# Altium PCB Power_supply_ver5.0.0.PcbDoc
Units mil, origin at the board's own origin, x right, y up, seen from the top; angles counter-clockwise.
Board outline 3734.72 x 2529.72 mil, 2 copper layers (Top Layer, Bottom Layer); 93 components, 41 nets, 269 pads, 30 vias.
Unrouted connection lines stored in the file: 19.
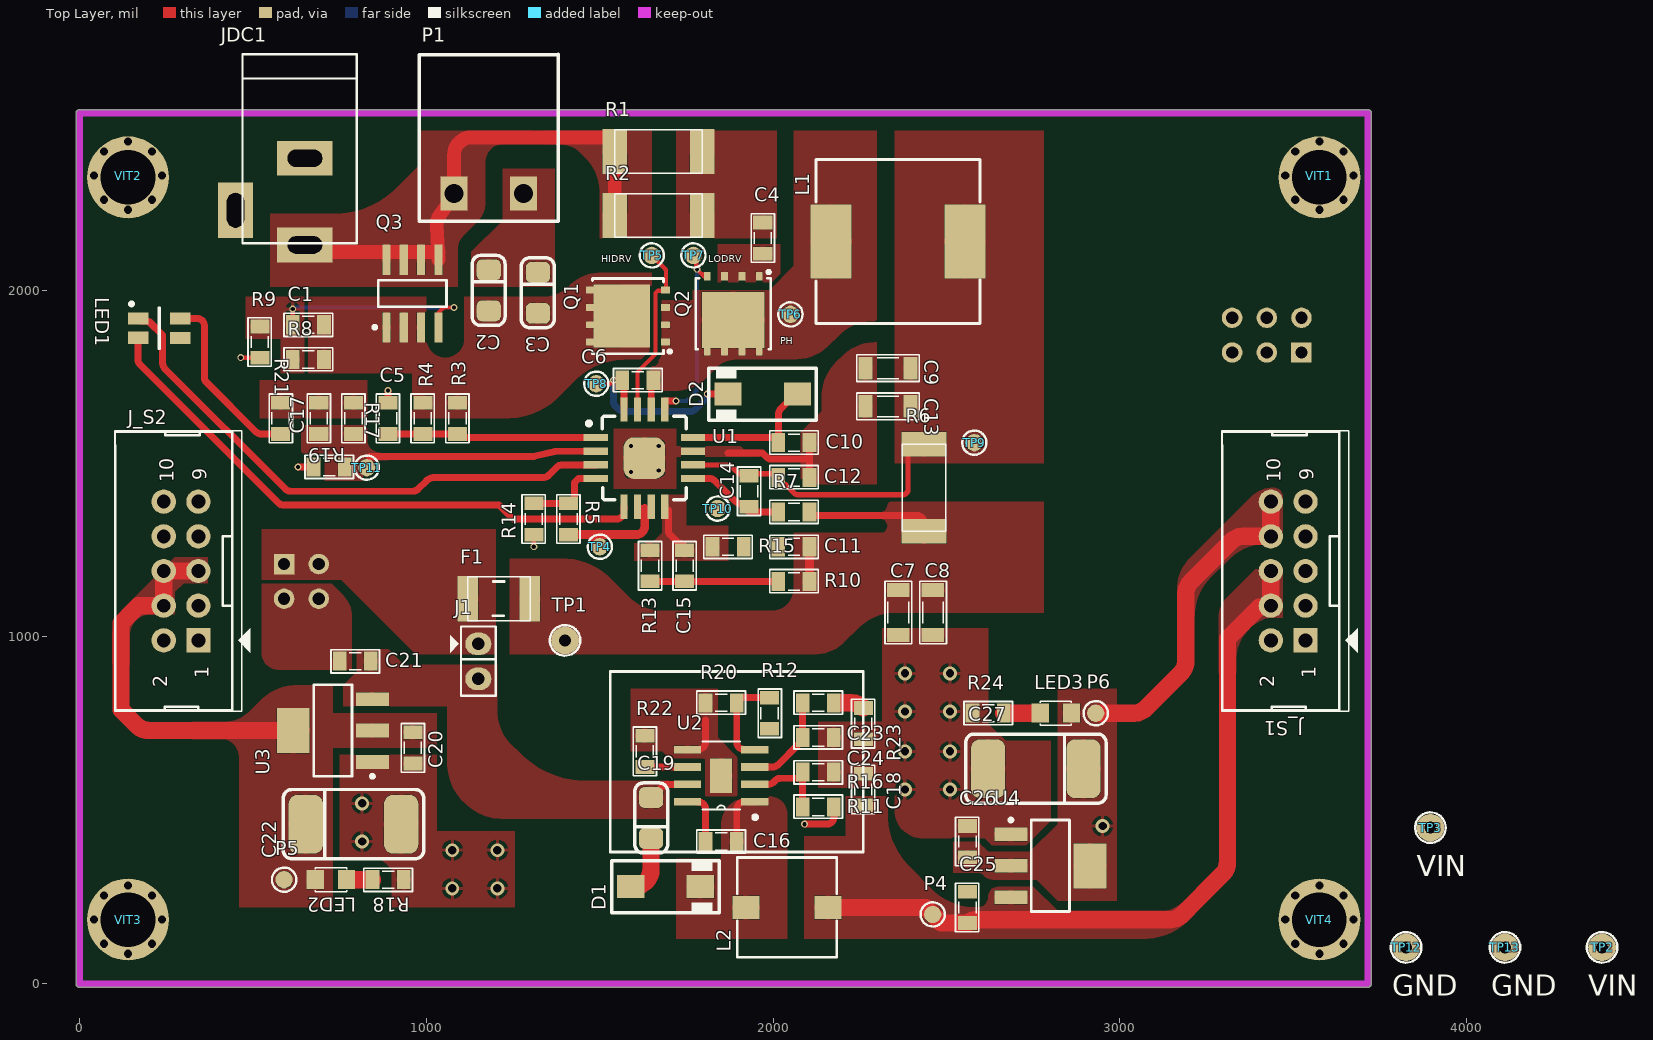
[diagram p0: Top Layer view]
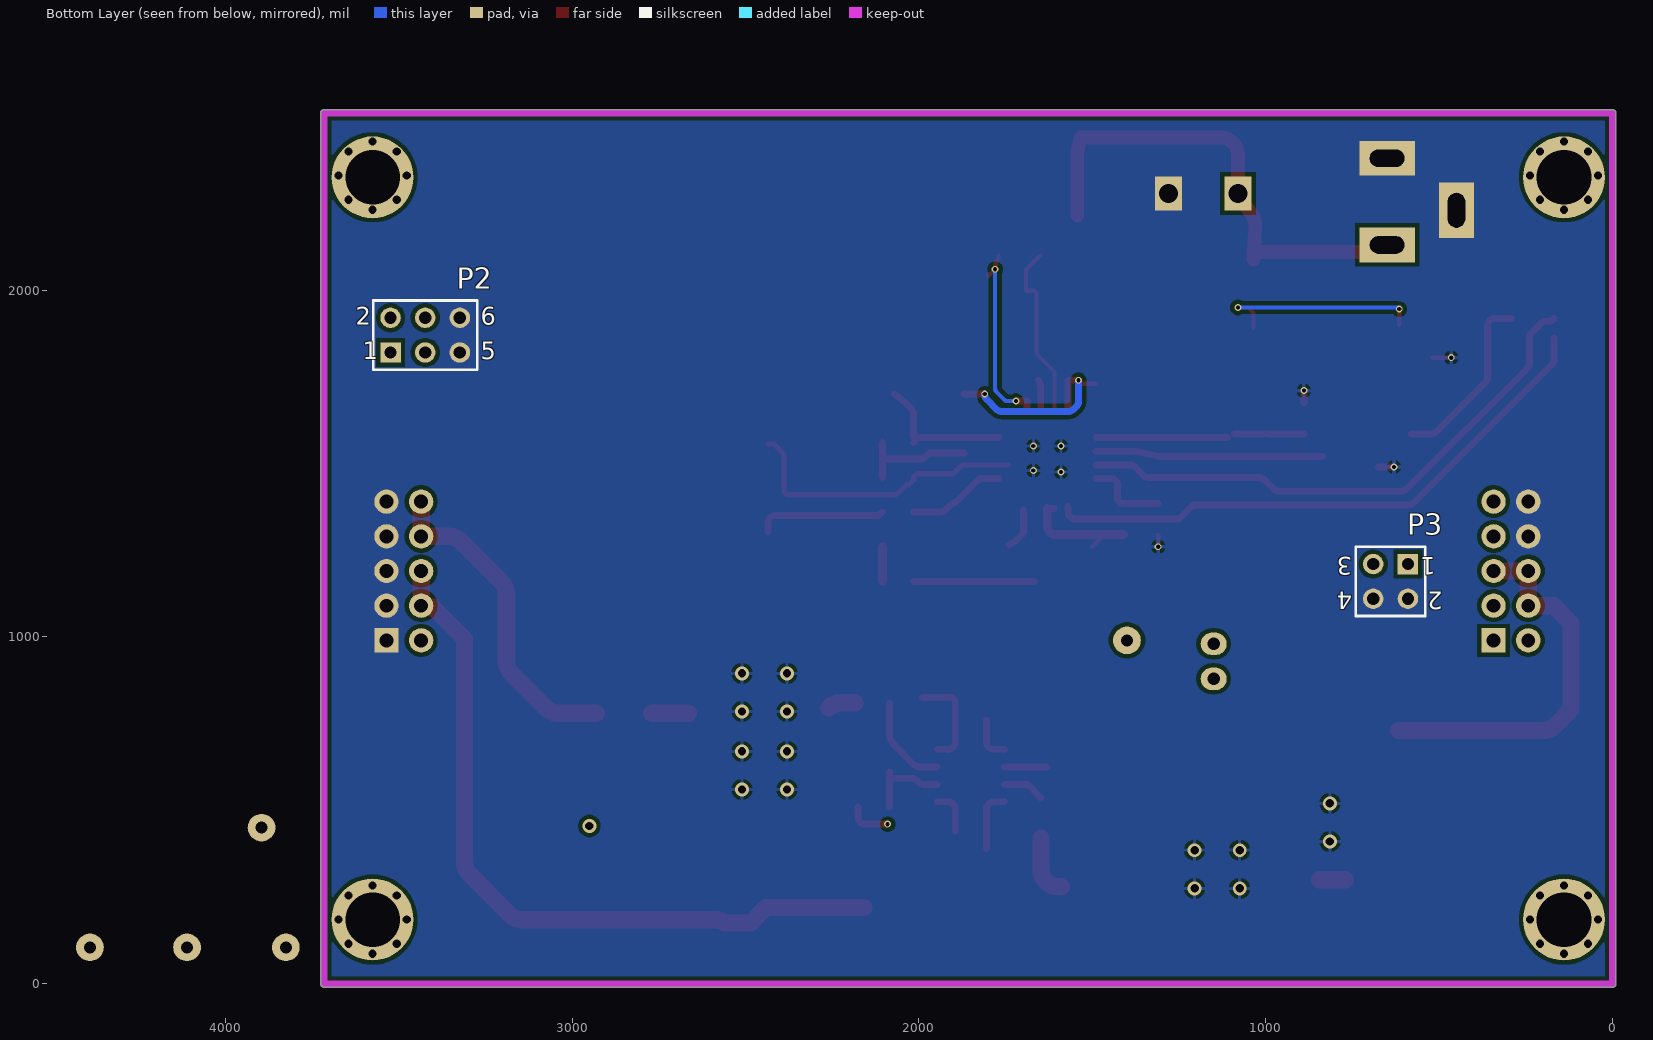
[diagram p1: Bottom Layer view, seen from below]

## Layer stack, top to bottom
Top Solder: solder mask 0.4, Solder Resist, Dk 3.5
Top Layer: signal copper 1.4
Dielectric 1: dielectric 12.6, FR-4, Dk 4.8
Bottom Layer: signal copper 1.4
Bottom Solder: solder mask 0.4, Solder Resist, Dk 3.5

## Board outline
0,-9.86 cw(c0,0) -9.86,0.08 -9.86,0.1 -9.86,2510 cw(c0,2510) 0,2519.86 3715,2519.86 cw(c3715,2510) 3724.86,2510 3724.86,0 cw(c3715,0) 3715,-9.86

## Design rules (kind name [scope] priority, off if disabled: settings)
Clearance [All] p1: gap=12 ignorepadtopadclearanceinfootprint=FALSE except(0: Arc-Text Arc-Hole Track-Text Track-Hole SMDPad-Text SMDPad-Hole THPad-Text THPad-Hole Via-Text Via-Hole Fill-Text Fill-Hole Poly-Text Poly-Hole Region-Text Region-Hole Text-Text Text-Hole; 8: Arc-Arc Arc-Track Arc-THPad Arc-Via Track-Track Track-THPad Track-Via SMDPad-THPad SMDPad-Via THPad-THPad THPad-Via Via-Via; 10: Arc-SMDPad Track-SMDPad SMDPad-SMDPad)
HoleSize HoleSize_1 [All] p1: absolutevalues=TRUE maxlimit=100 minlimit=1 maxpercent=80.000 minpercent=20.000
PlaneClearance [All] p1: clearance=15
PolygonConnect [All] p1: thpad.connectstyle=Direct thpad.reliefconductorwidth=10 thpad.reliefentries=4 thpad.polygonreliefangle="90 Angle" thpad.airgapwidth=10 smdpad.connectstyle=Relief smdpad.reliefconductorwidth=15 smdpad.reliefentries=4 smdpad.polygonreliefangle="90 Angle" smdpad.airgapwidth=0 via.connectstyle=Relief via.reliefconductorwidth=12 via.reliefentries=4 via.polygonreliefangle="90 Angle" via.airgapwidth=10
RoutingPriority [InNet('No Net')] p1: routingpriority=0
RoutingVias [All] p1: holewidth=20 width=20 viastyle="Through Hole" minholewidth=12 minwidth=20 maxholewidth=28 maxwidth=50
SMDToPlane [All] p1: distance=0
SolderMaskExpansion [All] p1: expansion=4 istentingtop=FALSE
SupplyNets "Schematic Supply Nets_6" [InNet('TERM_EN')] p1: voltage=0.000
SupplyNets "Schematic Supply Nets_5" [InNet('3V3')] p2: voltage=0.000
SupplyNets "Schematic Supply Nets_4" [InNet('GND')] p3: voltage=0.000
SupplyNets "Schematic Supply Nets_2" [InNet('5V_PS')] p4: voltage=0.000
SupplyNets "Schematic Supply Nets_1" [InNet('-5V')] p5: voltage=0.000
SupplyNets "Schematic Supply Nets" [InNet('5V_LDO')] p6: voltage=0.000
UnRoutedNet [All] p1: checkbadconnections=TRUE
Width [All] p1: maxlimit=50 minlimit=12 preferedwidth=20
26 further rules are at their usual default settings.

## Classes and differential pairs
component class Power_supply: C1 C2 C3 C4 C5 C6 C7 C8 C9 C10 C11 C12 C13 C14 C15 C16 C17 C18 C19 C21 C23 C24 C25 C27 D1 D2 F1 J1 J_S1 J_S2 JDC1 L1 L2 LED1 LED3 P1 P2 P3 P4 P5 Q1 Q2 Q3 R1 R2 R3 R4 R5 R6 R7 R8 R9 R10 R11 R12 R13 R14 R15 R16 R17 R18 R19 R20 R21 R22 R23 TP1 TP10 TP11 TP12 TP13 U1 U2 U3 VIT1 VIT2 VIT3 VIT4

## Components (designator, comment, footprint, x,y, rotation, side; value= is the part's Value field where it differs from the comment)
C1 "0.1uF" CAP_0805 660,1900 r0 top value=33p
C2 "106" CAP_3216 1178,1996.99 r270 top value=33p
C3 "106" CAP_3216 1320,1990 r270 top value=33p
C4 "2.2uF" CAP_0805 1970,2150 r90 top value=33p
C5 "0.1uF" CAP_0805 890,1630 r270 top value=33p
C6 "1uF" CAP_0805 1610,1740 r180 top value=33p
C7 "4.7uF" CAP_1206 2360.63,1070.32 r270 top value=33p
C8 "1uF" CAP_1206 2460.63,1070.32 r270 top value=33p
C9 "10uF" CAP_1206 2331.17,1774.37 r0 top value=33p
C10 "10uF" CAP_0805 2060,1560 r180 top value=33p
C11 "104" CAP_0805 2060,1260 r0 top value=33p
C12 "10uF" CAP_0805 2060,1460 r180 top value=33p
C13 "10uF" CAP_1206 2331.17,1664.37 r0 top value=33p
C14 "10uF" CAP_0805 1930,1420 r90 top value=33p
C15 "104" CAP_0805 1745,1205 r270 top value=33p
C16 "100nF" CAP_0805 1850,410 r0 top value=33p
C17 "22pF" CAP_0805 690,1630 r90 top value=33p
C18 "22uF 6.3V" CAP_0805 2260,560 r270 top value=33p
C19 "10uF 50V" CAP_3216 1650,480 r90 top value=33p
C20 "100nF" CAP_0805 961.14,680 r90 top value=33p
C21 "100nF" CAP_0805 795,930 r0 top value=33p
C22 "100uF" CAP_7343 787.64,460 r0 top
C23 "220pF" CAP_0805 2130,810 r180 top value=33p
C24 "100nF" CAP_0805 2130,710 r180 top value=33p
C25 "100nF" CAP_0805 2560,220 r270 top value=33p
C26 "100nF" CAP_0805 2560,410 r270 top value=33p
C27 "100uF" CAP_7343 2760,620 r180 top
D1 "SS34-HF" SMA 1690,280 r0 top value="Diode c?m 1N5408"
D2 "1N5819" SMA 1969.84,1700 r180 top value="Diode c?m 1N5408"
F1 "F1A" RES-SMD-1812 1220,1110 r180 top value=Fuse
J1 "Jumper 2" JP2 1150,980 r270 top value="JP 2"
J_S1 "SOURCE" IDC10 3435,1190 r90 top locked value="Header 5x2"
J_S2 "SOURCE_SIG" IDC10 243,1190 r90 top locked value="Header 5x2"
JDC1 "Jac DC" DC-IN 550,2255 r270 top
L1 "10uH" L-SMD-M-12x10 2360,2140 r90 top value="150 mH"
L2 "10uH" L-SMD-M-7.3x4.5 2040,220 r90 top value="150 mH"
LED1 "LED RGB SMD v1" "LED RGB 3528" 230,1890 r0 top
LED2 "LED" LED-0805-Blue 680,300 r0 top value="LED 3 ly Single Colour"
LED3 "LED" LED-0805-Blue 2860,780 r180 top value="LED 3 ly Single Colour"
P1 "BIG_Header 2" "BIG_Header 2" 1080,2278.5 r0 top
P2 "Header 3X2" HDR2X3 3523.32,1820 r180 bottom
P3 "Header 2X2" HDR2X2 590,1210 r0 bottom
P4 "TP" "Testpoint 50ml" 2460,200 r0 top value="Test Point"
P5 "TP" "Testpoint 50ml" 590,300 r90 top value="Test Point"
P6 "TP" "Testpoint 50ml" 2930,780 r0 top value="Test Point"
Q1 "AON6508" MOSFET_HP_8Pin 1581.73,1925 r180 top
Q2 "AON6508" MOSFET_HP_8Pin 1885,1931.73 r270 top
Q3 "AO4407A" SOIC-8 960,1990 r90 top
R1 "2R" RES-SMD-2512 1669.37,2394.68 r0 top
R2 "2R" RES-SMD-2512 1669.37,2209.68 r0 top
R3 "10R" RES-SMD-0805 1090,1630 r270 top
R4 "NC" RES-SMD-0805 990,1630 r270 top
R5 "10k" RES-SMD-0805 1410,1340 r270 top
R6 "0.05" RES-SMD-2512 2440,1430 r90 top
R7 "0R" RES-SMD-0805 2060,1360 r180 top
R8 "10R" RES-SMD-0805 660,1800 r180 top
R9 "10R" RES-SMD-0805 520,1850 r270 top
R10 "0R" RES-SMD-0805 2060,1160 r180 top
R11 "100k" RES-SMD-0805 2130,510 r180 top
R12 "249k" RES-SMD-0805 1990,780 r90 top
R13 "499k" RES-SMD-0805 1645,1205 r90 top
R14 "10k" RES-SMD-0805 1310,1340 r270 top
R15 "100k" RES-SMD-0805 1870,1260 r0 top
R16 "24.9k" RES-SMD-0805 2130,610 r0 top
R17 "499k" RES-SMD-0805 790,1630 r270 top
R18 "220" RES-SMD-0805 890,300 r0 top
R19 "36k" RES-SMD-0805 720,1490 r180 top
R20 "47k" RES-SMD-0805 1850,810 r180 top
R21 "1k" RES-SMD-0805 580,1630 r90 top
R22 "200k" RES-SMD-0805 1630,670 r90 top
R23 "68.1k" RES-SMD-0805 2260,750 r270 top
R24 "220" RES-SMD-0805 2620,780 r180 top
TP1 "TP" TP1 1400,990 r0 top value="Test Point"
TP2 "VIN" TP1 4390,105 r0 top value="Test Point"
TP3 "VIN" TP1 3895,450 r0 top value="Test Point"
TP4 "TP" "Testpoint 50ml" 1500,1260 r0 top value="Test Point"
TP5 "HIDRV" "Testpoint 50ml" 1650,2100 r90 top value="Test Point"
TP6 "PH" "Testpoint 50ml" 2050,1930 r90 top value="Test Point"
TP7 "LODRV" "Testpoint 50ml" 1770,2100 r90 top value="Test Point"
TP8 "TP" "Testpoint 50ml" 1490,1730 r90 top value="Test Point"
TP9 "TP" "Testpoint 50ml" 2580,1560 r90 top value="Test Point"
TP10 "TP" "Testpoint 50ml" 1840,1370 r90 top value="Test Point"
TP11 "TP" "Testpoint 50ml" 828.48,1487.94 r90 top value="Test Point"
TP12 "GND" TP1 3825,105 r90 top value="Test Point"
TP13 "GND" TP1 4110,105 r90 top value="Test Point"
U1 "BQ24650" VQFN-16 1628.83,1515.63 r270 top
U2 "MP1584" SOP8-PP 1850,600 r180 top
U3 "LM1117" SOT-223 730.42,730 r90 top
U4 "LM1117" SOT-223 2799.58,340 r270 top
VIT1 "1" "Screw Hole 4mm"#1 3575,2330 r0 top locked net-tie
VIT2 "1" "Screw Hole 4mm"#1 140,2330 r0 top locked net-tie
VIT3 "1" "Screw Hole 4mm"#2 140,185 r0 top locked net-tie
VIT4 "1" "Screw Hole 4mm"#2 3575,185 r0 top locked net-tie

## Footprints (in the part's own frame and the unit in brackets; to place one, negate y for a bottom-side part, rotate by r counter-clockwise, add the part's x,y. Pads: shape width x height; smd on the part's side, far side on the other; paste and mask are expansions set on the pad)
"BIG_Header 2" [mm]
  rect 2x2.5 hole 1.4: 1(0,0) 2(5.08,0)
  silkscreen extent -2.54,-2.03 7.62,10.21, body extent -2.5,-1.75 7.58,10.25, height 3.15
CAP_0805 [mil]
  rect 39.37x55 smd: 1(-45,0) 2(45,0)
  silkscreen extent -70,-34 70,33, body extent -40,-25 40,25, height 24
CAP_1206 [mil]
  rect 40x65 smd: 1(-65,0) 2(65,0)
  silkscreen extent -90,-38 90,39, body extent -63,-31 63,32, height 40
CAP_3216 [mil]
  rrect50% 60x70 smd: 1(-60.99,2) 2(56.99,2)
  silkscreen extent -103,-46 99,49, body extent -65,-30 61,32, height 39
CAP_7343 [mm] "Capacitor Tantalum 7343"
  rrect50% 2.5x4.3 smd: 1(-3.429,0) 2(3.556,0)
  silkscreen extent -5.08,-2.54 5.21,2.54, body extent -3.75,-2.14 3.75,2.16, height 2.8
DC-IN [mil] "Jac DC input"
  rect 100x160 hole 50 slot 100 at 90 deg: 1(125,100) 2(-125,100)
  rect 160x100 hole 50 slot 100 at 0 deg: 3(25,-100)
  silkscreen extent -425,-80 120,250, body extent -410,-105 134,269, height 434
HDR2X2 [mm] "Connector; Header; 2x2 Position"
  rect 1.5x1.5 hole 0.9: 1(0,0)
  round 1.5 hole 0.9: 2(0,2.54) 3(2.54,0) 4(2.54,2.54)
  silkscreen extent -1.27,-1.27 3.81,3.81, body extent -1.27,-1.27 3.81,3.81, height 7
HDR2X3 [mm] "Connector; Header; 3x2 Position"
  rect 1.5x1.5 hole 0.9: 1(0,0)
  round 1.5 hole 0.9: 2(0,2.54) 3(2.54,0) 4(2.54,2.54) 5(5.08,0) 6(5.08,2.54)
  silkscreen extent -1.27,-1.27 6.35,3.81, body extent -1.27,-1.27 6.35,3.81, height 7
IDC10 [mil]
  rect 70x70 hole 40: 1(-200,-100)
  round 70 hole 40: 2(-200,0) 3(-100,-100) 4(-100,0) 5(0,-100) 6(0,0) 7(100,-100) 8(100,0) 9(200,-100) 10(200,0)
  silkscreen extent -405,-250 405,141, body extent -400,-223 400,135, height 366
JP2 [mil]
  oval 65x75 hole 36: 1(0,0) 2(101,0)
  silkscreen extent -50,-81 150,50, body extent -48,-50 148,48, height 323
L-SMD-M-7.3x4.5 [mm] "WE-PDA SMD Shielded Power Inductor, 7345"
  rect 1.7x2 smd: 1(0,3) 2(0,-3)
  silkscreen extent -3.65,-3.65 3.65,3.65, body extent -3.65,-3.65 3.65,3.65, height 4.05
L-SMD-M-12x10 [mm] "WE-PDA SMD Shielded Power Inductor, 1210"
  rect 5.4x3 smd: 1(0,4.9) 2(0,-4.9)
  silkscreen extent -6,-6 6,6, body extent -6,-6 6,6, height 9.7
"LED RGB 3528" [mm]
  rect 1.5x0.9 smd: 1(1.55,0.707) 2(1.55,-0.71) 3(-1.55,0.707) 4(-1.55,-0.707)
  silkscreen extent -2.15,-1.5 0.03,1.9, body extent -1.75,-1.4 1.75,1.4, height 1.87
LED-0805-Blue [mil]
  rect 50x55 smd: 1(0,0) 2(90,0)
  silkscreen extent 0,-35 90,35, body extent 5,-25 85,25, height 43
MOSFET_HP_8Pin [mm]
  rect 0.65x0.5 smd: 1(-2.75,1.905) 2(-2.75,0.635) 3(-2.75,-0.635) 4(-2.75,-1.905)
  rect 0.55x0.5 smd: 5(2.795,-1.905) 6(2.795,-0.635) 7(2.795,0.635) 8(2.795,1.905)
  rect 4.12x4.6 smd: 9(0.46,0)
  silkscreen extent -3.13,-2.75 2.6,2.75, body extent -3,-2.75 3.05,2.75, height 0.95
RES-SMD-0805 [mil]
  rect 39.37x55 smd: 1(-45,0) 2(45,0)
  silkscreen extent -70,-34 70,33, body extent -39,-25 39,25, height 31
RES-SMD-1812 [mm] "Chip Capacitor, Body 3.2x2.5mm, IPC Medium Density"
  rect 1.5x3.3 smd: 1(-1.996,0) 2(2.54,0)
  silkscreen extent -2.04,-1.6 2.54,1.6, body extent -2,-1.6 2.5,1.6, height 0.6
RES-SMD-2512 [mm] "Chip Capacitor, Body 3.2x2.5mm, IPC Medium Density"
  rect 1.8x3.3 smd: 1(-3.2,0.127) 2(3.2,0.127)
  silkscreen extent -3.2,-1.47 3.2,1.73, body extent -3.2,-1.47 3.2,1.73, height 0.6
"Screw Hole 4mm"#1 [mm]
  round 0.6 hole 0.6: 1(-2.5,0) 1(-1.768,-1.768) 1(-1.768,1.768) 1(0,-2.5) 1(0,2.5) 1(1.768,-1.768) 1(1.768,1.768) 1(2.5,0)
  round 6 hole 4: 1(0,-0.127)
"Screw Hole 4mm"#2 [mm]
  round 0.6 hole 0.6: 1(-2.5,0) 1(-1.768,-1.768) 1(-1.768,1.768) 1(0,-2.5) 1(0,2.5) 1(1.768,-1.768) 1(1.768,1.768) 1(2.5,0)
  round 6 hole 4: 1(0,0)
SMA [mm]
  rect 2x1.7 smd: 1(-2.544,0) 2(2.544,0)
  silkscreen extent -3.94,-1.9 3.94,1.91, body extent -2.87,-1.4 2.87,1.4, height 2.29
SOIC-8 [mm] "SOIC, 8-Leads, Body 5,0x4,0mm (max), Pitch 1,27mm, IPC Medium Density"
  rect 2.2x0.6 smd: 1(-2.475,1.905) 2(-2.475,0.635) 3(-2.475,-0.635) 4(-2.475,-1.905) 5(2.475,-1.905) 6(2.475,-0.635) 7(2.475,0.635) 8(2.475,1.905)
  silkscreen extent -2.6,-2.5 0.98,2.88, body extent -3.2,-2.5 3.2,2.5, height 1.75
SOP8-PP [mil]
  rect 78x22 smd: 1(-96.99,75.01) 2(-96.99,25.01) 3(-96.99,-24.99) 4(-96.99,-74.99) 5(97.01,-74.99) 6(97.01,-24.99) 7(97.01,25.01) 8(97.01,75.01)
  rect 64x100 smd: 9(0,0)
  silkscreen extent -100,-98 54,121, body extent -119,-99 119,99, height 63
SOT-223 [mm] "SOT223, 4-Leads, Body 6.5x3.5mm, Pitch 2.3mm, Lead Span 7mm, IPC Medium Density"
  rect 1x2.4 smd: 1(-2.3,-2.9) 2(0,-2.9) 3(2.3,-2.9)
  rect 3.3x2.4 smd: 2(0,2.9)
  silkscreen extent -3.47,-3.03 3.35,1.4, body extent -3.23,-3.39 3.27,3.5, height 1.72
"Testpoint 50ml" [mil]
  round 50 smd: 1(0,0)
  silkscreen extent -35,-35 35,35
TP1 [mil] "Test point"
  round 80 hole 35: 1(0,0)
  silkscreen extent -44,-44 44,44, body extent -50,-50 50,50, height 178
VQFN-16 [mil]
  rect 21x70 smd: 1(-59.05,-140) 2(-19.68,-140) 3(19.69,-140) 4(59.06,-140) 9(59.06,140) 10(19.69,140) 11(-19.68,140) 12(-59.05,140)
  rect 70x21 smd: 5(140,-59.05) 6(140,-19.68) 7(140,19.69) 8(140,59.06) 13(-140,59.06) 14(-140,19.69) 15(-140,-19.68) 16(-140,-59.05)
  rrect50% 120x120 smd: 17(0,0)
  silkscreen extent -120,-164 120,120, body extent -118,-118 118,118, height 31

## Part data
C1 C2 C3 C4 C5 C6 C7 C8 C9 C10 C11 C12 C13 C14 C15 C17: library part CapSMD, "Capacitor", LatestRevisionDate=17-Jul-2002, LatestRevisionNote="Re-released for DXP Platform.", PackageReference=RAD-0.3, Published=8-Jun-2000, Publisher="Altium Limited"
C16 C18 C20 C21 C23 C24 C25 C26: library part CapSMD, "C 0805", LatestRevisionDate=17-Jul-2002, LatestRevisionNote="Re-released for DXP Platform.", PackageReference=RAD-0.3, Published=8-Jun-2000, Publisher="Altium Limited"
C19: library part CapSMD, "C 1206", LatestRevisionDate=17-Jul-2002, LatestRevisionNote="Re-released for DXP Platform.", PackageReference=RAD-0.3, Published=8-Jun-2000, Publisher="Altium Limited"
C22 C27: library part CAP_TAN_SMD, "C Tan 7343"
D1 D2: library part 1N5822, "Schottky Rectifiers"
F1: library part Fuse, "Fuse 5A", Designed by=VanDungEvn
J1: library part "JP 2"
J_S1 J_S2: library part "IDC 5X2"
JDC1: library part DCIN, "Jac DC input"
L1: library part Inductor, "Inductor"
L2: library part Inductor, "6.8-10uH"
LED2 LED3: "LED Single colour Green and Red"
P2: "Header, 3-Pin, Dual row", LatestRevisionDate=17-Jul-2002, LatestRevisionNote="Re-released for DXP Platform.", Publisher="Altium Limited"
P3: "Header, 2-Pin, Dual row", LatestRevisionDate=17-Jul-2002, LatestRevisionNote="Re-released for DXP Platform.", Publisher="Altium Limited"
P4 P5 P6 TP4 TP5 TP6 TP7 TP8 TP9 TP10 TP11: library part TP_1, "Test Point"
Q1 Q2: library part MOSFET-N, "MFET-CHP"
Q3: library part MOSFET-P, "MFET-ChP", componentlink1description="New link", ComponentLink1URL=https://linhkien.cxtvn.com/3834-ru20p7c-mosfet-p-ch-5a-20v-sot-23.html
R1 R2 R6: library part "Resistor - SMD", "Resistor - SMD 2512", Manufacturer="Generic Components", Class=Passive, Published=08/06/2000, Publisher="Altium Hobart Technology Centre"
R3 R4 R5 R7 R10 R13 R14 R15 R17 R19 R21: library part "Resistor - SMD", "Resistor - SMD 0805", Manufacturer="Generic Components", Class=Passive, Published=08/06/2000, Publisher="Altium Hobart Technology Centre"
R8 R9 R11 R18 R22 R23 R24: library part "Resistor - SMD", "R 0805", Manufacturer="Generic Components", Class=Passive, Published=08/06/2000, Publisher="Altium Hobart Technology Centre"
R12 R16 R20: library part "Resistor - SMD", "R 0805 1%", Manufacturer="Generic Components", Class=Passive, Published=08/06/2000, Publisher="Altium Hobart Technology Centre"
TP1 TP2 TP3 TP12 TP13: library part TP1, "Test Point"
U1: "BQ24650 Stand-Alone Synchronous Buck Battery Charge Controller for Solar Power / With Maximum Power Point Tracking"
U2: "MP1584, The wide 4.5V to 28V input range accommodates a   variety   of   step-down   applications, SOIC8E"
U3 U4: "3V3 5V LDO, AMS1117, LDI1117", Creator="Nguyen Ba Bien", Website=http://group3i.net
VIT1 VIT2 VIT3 VIT4: library part VIT, "Oc Vit"

## Via types
v1: diameter 40, hole 24, Top Layer to Bottom Layer, 15 vias
v2: diameter 20, hole 12, Top Layer to Bottom Layer, 15 vias

## Nets (pads, with @x,y where several pads share a name; then routed paths per layer and width w, separated by ;. In a path a pad name is that pad's centre, name@x,y a point inside that pad or via, vN(x,y) a via of type N, cw(c..) or ccw(c..) an arc to the next point about the centre after c; other vN are vias at no path point)
3V3: C26.2 C27.1 J_S1.8 J_S1.10 J_S2.2 LED3.1 P6.1 U4.2 | length 945.3
  Top Layer w50: P6.1 3039.29,780 ccw(c3039.29,830) 3074.59,794.59 3175.41,895.41 ccw(c3140,930.71) 3190,930.71 3190,1124.29 cw(c3240,1124.29) 3204.59,1159.59 3320.41,1275.41 cw(c3355.71,1240) 3355.71,1290 J_S1.8 J_S1.10
  other v1: 2950,455
5V_LDO: C20.2 C22.1 J_S2.4 J_S2.5 J_S2.6 LED2.1 P5.1 U3.2 | length 1112.7
  Top Layer w50: J_S2.5 J_S2.6 J_S2.4 170,1090 120,1040 120,790 165.36,744.64 165.41,744.59 ccw(c200.71,780) 200.71,730 U3.2@616.24,730
5V_PS: C18.2 C25.2 J_S1.4 J_S1.6 L2.2 P4.1 R12.1 TP3.1 U4.3 | length 2157.8
  Top Layer w50: L2.2 2440,220 P4.1 2485,175 C25.2 cw(c2590,135) 2590,185 3144.29,185 ccw(c3144.29,235) 3179.64,199.64 3295.41,315.41 ccw(c3260,350.71) 3310,350.71 3310,995 3401.17,1086.17 3431.17,1086.17 J_S1.4 J_S1.6
-5V: J_S1.2 P2.3 P2.4
BTST: C6.2 D2.2 TP8.1 U1.16 | length 597.8
  Top Layer w12: TP8.1 1529.28,1730 1539.28,1740 v2(1540,1740)
  Top Layer w20: v2(1540,1740) C6.2@1568.2,1740 ; U1.16 C6.2@1569.78,1740 ; v2(1810,1700) D2.2
  Bottom Layer w20: v2(1540,1740) 1540,1678.28 ccw(c1560,1678.28) 1545.83,1664.17 1554.17,1655.83 ccw(c1568.28,1670) 1568.28,1650 1761.72,1650 ccw(c1761.72,1670) 1773.72,1654 ccw(c1761.72,1670) 1775.82,1655.82 1804.17,1684.17 ccw(c1790,1698.28) 1810,1698.28 v2(1810,1700)
GND: C2.1 C3.1 C4.1 C5.1 C7.2 C8.2 C9.1 C10.1 C11.1 C12.1 C13.1 C18.1 C19.1 C20.1 C21.1 C22.2 C24.1 C25.1 C26.1 C27.2 D1.1 J_S1.1 J_S1.3 J_S1.5 J_S1.7 J_S1.9 J_S2.8 J_S2.10 JDC1.2 JDC1.3 P1.2 P2.5 P2.6 P3.2 P3.4 Q2.1 Q2.2 Q2.3 R9.2 R14.2 R15.2 R16.2 R18.2 R19.2 R20.2 R22.2 R23.2 R24.2 TP12.1 TP13.1 U1.11 U1.17 U2.5 U2.9 U3.1 U4.1 | length 814.5
  Top Layer w12: v2(465,1805) R9.2 ; v2(1310,1260) R14.2
  Top Layer w20: v2(630,1490) R19.2 ; C5.1 v2(890,1710) ; U2.5 1781.99,675.99 1785,675.99 ccw(c1785,695.99) 1805,695.99 1805,760 ; 1870,1530 1969.53,1530 1981.17,1518.36 1981.21,1518.32 ccw(c1995.32,1532.5) 1983.32,1516.5 ccw(c1995.32,1532.5) 1995.32,1512.5 2105,1512.5 ; C12.1 2105,1512.5 ; C10.1 2105,1512.5
  Top Layer w50: D1.1 1604.21,280.39 ccw(c1598,330) 1648,330 C19.1
  other v1: 1075,275 1205,275 1075,385 1205,385 815,410 815,520 2380,560 2510,560 2380,670 2510,670 2380,785 2510,785 2380,895 2510,895
  other v2: 1590,1475 1670,1480 1590,1550 1670,1550
HIDRV: Q1.4 TP5.1 U1.15 | length 508.5
  Top Layer w12: U1.15 1609.15,1763.96 1660.72,1815.54 1660.72,1991.12 1667.75,1998.15 1691.11,1998.15 1691.11,2053.92 ccw(c1679.11,2053.92) 1687.59,2062.41 TP5.1
I2CSW_SCL: J_S2.7
I2CSW_SDA: J_S2.9
LODRV: Q2.4 TP7.1 U1.13 | length 551.5
  Top Layer w12: TP7.1 1770,2089.72 1778.47,2081.25 1778.47,2061.53 v2(1780,2060) 1793.2,2046.8 1796.16,2046.8 1800,2042.95 1800,2040
  Top Layer w20: U1.13 1687.89,1679.09 1688.39,1679.59 1711.85,1679.59 1712.26,1680 v2(1720,1680)
  Bottom Layer w12: v2(1720,1680) 1745.03,1680 ccw(c1745.03,1692) 1753.49,1683.49 1776.51,1706.51 ccw(c1768,1714.97) 1777.6,1707.77 ccw(c1768,1714.97) 1780,1714.97 v2(1780,2060)
MPPSET: C17.1 R17.2 R19.1 TP11.1 U1.2 | length 654.2
  Top Layer w20: 836.33,1520 1306.17,1520 ccw(c1306.17,1540) 1310.79,1520.54 1370.77,1534.79 cw(c1375.31,1515.31) 1375.31,1535.31 U1.2
NetC1_1: C1.1 Q3.4 R8.2 R9.1 | length 604.2
  Top Layer w12: C1.1 v2(615,1945) ; Q3.4 1035,1930.03 cw(c1047,1930.03) 1038.49,1938.49 1046.51,1946.51 cw(c1054.97,1938) 1054.97,1950 v2(1080,1950)
  Bottom Layer w12: v2(615,1945) 616.51,1946.51 cw(c624.97,1938) 624.97,1950 v2(1080,1950)
NetC4_2: C4.2 R1.2 R2.2
NetC5_2: C5.2 R3.2 R4.2 U1.1 | length 576.3
  Top Layer w20: C5.2 R4.2 ; R4.2@992.5,1585.86 1007.5,1585.12 1009.52,1585.02 ccw(c1010.49,1605) 1010.49,1585 R3.2 ; R3.2@1110,1574.68 U1.1
NetC7_1: C7.1 C8.1 C11.2 F1.1 R6.1 R7.1 R10.1 TP1.1 | length 470.5
  Top Layer w20: R7.1 2114.69,1352.05 2118.43,1350.89 ccw(c2124.34,1370) 2124.34,1350 2415.06,1350 cw(c2415,1330) 2435,1330.01 2435,1329.46 R6.1
  Top Layer w25: R10.1 C11.2
NetC10_2: C10.2 D2.1 U1.12 | length 396.5
  Top Layer w20: U1.12 1793.83,1574.68 C10.2@2000.32,1574.68 ; C10.2@2008.21,1574.49 C10.2 ; C10.2@2015,1574.68 2015,1640.55 cw(c2040,1640.55) 2022.3,1658.2 2043.13,1679.04 D2.1
NetC15_1: C15.1 R13.2 R15.1 U1.8 | length 120.3
  Top Layer w20: U1.8@1697.89,1365.63 1697.89,1307.58 ccw(c1717.89,1307.58) 1703.71,1293.47 1722.5,1274.69 C15.1@1740,1265
NetC15_2: C15.2 R10.2 R13.1 | length 348.2
  Top Layer w20: R13.1@1666.79,1160 R10.2
NetC16_1: C16.1 U2.8 | length 176.8
  Top Layer w20: U2.8 1781.99,523.99 1785.69,523.87 cw(c1785,503.88) 1805,503.88 C16.1@1805,390.5
NetC16_2: C16.2 D1.2 L2.1 U2.1 | length 127.4
  Top Layer w20: 1895,440 1895,503.99 cw(c1915,503.99) 1915,523.99 1917.99,523.99 U2.1
NetC23_1: C23.1 R23.1 | length 79.7
  Top Layer w50: C23.1@2184.4,810 2224.29,810 cw(c2224.29,760) 2259.59,795.41 R23.1
NetC23_2: C23.2 C24.2 U2.3 | length 275.4
  Top Layer w20: U2.3 1999.53,624.99 ccw(c1999.53,644.99) 2013.64,630.82 2075.32,692.5 C24.2 C23.2
NetLED1_1: LED1.1 R21.1 | length 520.7
  Top Layer w20: LED1.1 340,1917.85 cw(c340,1897.85) 360,1897.85 360,1748.22 ccw(c380,1748.28) 365.82,1734.18 509.17,1590.83 ccw(c523.29,1605) 523.29,1585 R21.1
NetLED1_3: LED1.3 U1.3 | length 1604.3
  Top Layer w20: LED1.3 176.69,1910.14 199.86,1910.14 240,1870 240,1788.22 ccw(c260,1788.28) 245.81,1774.19 594.14,1425.86 ccw(c608.28,1440) 608.28,1420 961.72,1420 ccw(c961.72,1440) 973.72,1424 ccw(c961.72,1440) 975.83,1425.83 1000.02,1450.02 cw(c1014.11,1435.82) 1002.11,1451.82 cw(c1026.64,1419.11) 1026.64,1460 1338.72,1460 ccw(c1338.72,1480) 1350.72,1464 ccw(c1338.72,1480) 1352.86,1465.86 1377.09,1490.08 cw(c1391.23,1475.94) 1379.23,1491.94 cw(c1391.23,1475.94) 1391.23,1495.94 U1.3
NetLED1_4: LED1.4 U1.5 | length 1684.5
  Top Layer w20: LED1.4 168.98,1799.31 ccw(c188.98,1799.31) 172.98,1787.31 ccw(c188.98,1799.31) 174.8,1785.2 574.18,1385.82 ccw(c588.28,1400) 576.28,1384 ccw(c588.28,1400) 588.28,1380 1210,1380 1250,1340 1549.33,1340 ccw(c1549.33,1360) 1563.44,1345.83 1569.28,1351.67 U1.5
NetLED2_2: LED2.2 R18.1 | length 75
  Top Layer w50: LED2.2 R18.1
NetLED3_2: LED3.2 R24.1 | length 105
  Top Layer w50: R24.1 LED3.2
NetR5_1: R5.1 R14.1 U1.4 | length 230
  Top Layer w20: R14.1 R5.1 ; R5.1@1417.81,1385 1427.5,1394.69 1427.5,1444.85 1439.22,1456.57 U1.4
NetR11_2: R11.2 R16.1 U2.2 | length 233.9
  Top Layer w20: U2.2 1986.71,574.99 ccw(c1986.71,594.99) 2000.82,580.82 2006.67,586.67 cw(c2020.78,572.5) 2020.78,592.5 R16.1@2075.31,592.5 ; R11.2 2085,592.5 R16.1
NetR12_2: R12.2 R20.1 U2.4 | length 281.8
  Top Layer w20: U2.4 1917.99,675.99 1915,675.99 cw(c1915,695.99) 1895,695.99 R20.1 1895,815.31 1904.69,825 R12.2
NetR22_1: R22.1 U2.6 | length 123
  Top Layer w20: R22.1 U2.6
PH: C6.1 L1.1 Q1.1 Q1.2 Q1.3 Q2.5 Q2.6 Q2.7 Q2.8 Q2.9 TP6.1 U1.14 | length 85.5
  Top Layer w20: U1.14 1648.52,1722.5 C6.1
SRN: C14.1 R7.2 TP10.1 U1.9 | length 282.9
  Top Layer w20: U1.9 1816.79,1456.57 cw(c1816.79,1436.57) 1828.79,1452.57 cw(c1816.79,1436.57) 1830.93,1450.71 1891.33,1390.31 1908.83,1380.63 1918.51,1370.94 1923.63,1365.83 ccw(c1937.74,1380) 1937.74,1360 R7.2
SRP: C9.2 C12.2 C13.2 C14.2 L1.2 R6.2 TP9.1 U1.10 | length 854.8
  Top Layer w15: U1.10@1742.4,1495.94 1869.49,1495.94 cw(c1869.49,1480.94) 1880.09,1491.55 1888.83,1482.81 1901.01,1470.63 1908.83,1470.63 2005.32,1470.63 2015,1460.94 C12.2 2015,1452.19 2028.69,1438.5 2036.5,1438.5 2061.49,1413.51 ccw(c2069.97,1422) 2069.97,1410 2375.03,1410 ccw(c2375.03,1422) 2383.49,1413.49 2385.11,1415.11 ccw(c2376.6,1423.57) 2388.6,1423.57 2388.6,1526.56 2418.03,1555.99 R6.2
TERM_EN: R5.2 TP4.1 U1.6 U1.7 | length 368.5
  Top Layer w12: 1450,1295 1465,1295 TP4.1
  Top Layer w20: U1.6@1610.31,1370 1630,1370
  Top Layer w25: R5.2 1450,1295 1605,1295 ccw(c1605,1320) 1630,1320 1630,1370
V_BATT: F1.2 J1.1 P3.1 P3.3
V_IN: C17.2 JDC1.1 P1.1 Q3.5 Q3.6 Q3.7 Q3.8 R1.1 R2.1 R17.1 R21.2 | length 1413.2
  Top Layer w40: JDC1.1 705,2110 Q3.5@1035,2110 ; Q3.5 1030.1,2185.27 cw(c1080.04,2187.72) 1039.09,2216.41 1065.63,2254.29 P1.1 1080,2390 cw(c1130,2390) 1130,2440 1494.25,2440 cw(c1494.25,2390) 1494.71,2440 1532.96,2439.64 R1.1 R2.1
V_IN_MOS: C1.2 C2.2 C3.2 P2.1 P2.2 Q1.5 Q1.6 Q1.7 Q1.8 Q1.9 Q3.1 Q3.2 Q3.3 R3.1 R4.1 R8.1
V_LOAD: C19.2 C21.2 J1.2 R11.1 TP2.1 U2.7 U3.3 | length 248.5
  Top Layer w20: C19.2 1650.29,536.99 1669.91,556.61 1669.91,558.91 1686,574.99 U2.7 ; v2(2090,460) 2155,460 ccw(c2155,480) 2175,480 R11.1
WDT_PWM: J_S2.1
WDT_RESET: J_S2.3
pads on no net: LED1.2 VIT1.1 VIT2.1 VIT3.1 VIT4.1

## Polygon pours and split planes (outlines as drawn)
PH on Top Layer "NONET_L01_P-001" (solid, pour order 5): 2161.21,1841.21 2188.79,1868.79 cw(c2288.28,1769.29) 2298.28,1909.64 2298.28,2460 2060,2460 2060,2070 1990,2000 1768.81,2000 1768.81,1970 1670,1970 1670,1790 1660,1780 1640,1780 1640,1710 1721.72,1710 ccw(c1721.72,1826.57) 1804.14,1744.14 1835.86,1775.86 cw(c1894.14,1717.58) 1894.14,1800 2061.72,1800 ccw(c2061.72,1940.71)
GND on Top Layer "NONET_L01_P-001" (solid, pour order 26): 2298.28,1850 2298.28,1440 2090,1440 2080,1450 2080,1590 2140,1650 2140,1691.72 cw(c2280.71,1691.72) 2181.21,1791.21 2198.79,1808.79 cw(c2298.28,1709.29)
GND on Top Layer "NONET_L01_P-001" (solid, pour order 29): 2020,2132.6 2020,2022.6 1840,2022.6 1840,2132.6
NetC4_2 on Top Layer "NONET_L01_P-001" (solid, pour order 28): 1720,2460 2010,2460 2010,2150 1720,2150
V_IN on Top Layer "NONET_L01_P-001" (solid, pour order 27): 1650,2460 1440,2460 1340,2460 1340,2420 1385.86,2420 cw(c1385.86,2337.58) 1444.14,2395.86 1458.79,2381.21 cw(c1359.3,2281.72) 1500,2281.72 1500,2150 1650,2150
V_IN on Top Layer "NONET_L01_P-001" (solid, pour order 0): 1220,2420 1300,2420 1300,2460 980,2460 980,2360 915.36,2295.36 cw(c733.43,2477.27) 733.43,2220 550,2220 550,2010 1090,2010 1090,2115.86 cw(c1148.28,2115.86) 1107.07,2157.07 1145.86,2195.86 ccw(c1087.57,2254.14) 1170,2254.14 1170,2370 cw(c1220,2370)
GND on Top Layer "NONET_L01_P-001" (solid, pour order 11): 1130,2010 1130,2110 1220,2200 1220,2350 1370,2350 1370,2010
V_BATT on Top Layer "NONET_L01_P-001" (solid, pour order 20): 1200,950 1200,1310 525,1310 525,1165 755,1165 970,950
SRP on Top Layer "NONET_L01_P-001" (solid, pour order 25): 2350,1500 2350,2460 2780,2460 2780,1500
NetC7_1 on Top Layer "NONET_L01_P-001" (solid, pour order 9): 2245.25,1025.25 2204.14,984.14 cw(c2121.72,1066.57) 2121.72,950 1240,950 1240,1225 1396.72,1225 cw(c1396.72,1036.02) 1530.36,1169.64 1585.25,1114.75 ccw(c1681.21,1210.71) 1681.21,1075 1995,1075 ccw(c1995,1140) 2060,1140 2060,1300 2310,1300 ccw(c2310,1320) 2330,1320 ccw(c2310,1320) 2310,1340 2280,1340 2280,1360 2310,1360 ccw(c2310,1380) 2330,1380 cw(c2340,1380) 2340,1390 2780,1390 2780,1070 2353.28,1070 ccw(c2353.28,917.22)
5V_LDO on Top Layer "NONET_L01_P-001" (solid, pour order 24): 370,1230 370,1155 300,1155 275,1130 275,1065 205.36,1065 ccw(c205.35,1003.79) 162.07,1047.07 ccw(c203.28,1005.86) 145,1005.86 145,920 100,920 95,915 95,1003.79 cw(c206.57,1003.79) 127.68,1082.68 275,1230
3V3 on Top Layer "NONET_L01_P-001" (solid, pour order 23): 3442.23,1430 ccw(c3442.23,1340.13) 3378.68,1403.68 3201.21,1226.21 ccw(c3288.64,1138.79) 3165,1138.79 3165,1060 3215,1060 cw(c3371.92,1060) 3260.96,1170.96 3310.25,1220.25 cw(c3430.35,1100.15) 3430.36,1270 ccw(c3430.36,1309.64) 3470,1309.64 3470,1402.23 ccw(c3442.23,1402.23)
5V_PS on Top Layer "NONET_L01_P-001" (solid, remove dead copper, pour order 22): 3335,933.79 3335,895 3285,895 3285,1055.86 cw(c3367.43,1055.86) 3309.14,1114.14 3390,1195 3470,1195 3470,1055.86 3446.21,1055.86 ccw(c3446.21,958.43) 3377.32,1027.32 3371.21,1021.21 ccw(c3458.64,933.79)
GND on Top Layer "NONET_L01_P-001" (solid, pour order 15): 2315,1025 2620,1025 2620,750 2670,700 2800,700 2800,470 2730,400 2630,400 2610,420 2430,420 cw(c2430,500) 2350,500 2350,565 2130,565 2130,755 2315,755
3V3 on Top Layer "NONET_L01_P-001" (solid, pour order 14): 2520,410 2520,320 2588.79,320 cw(c2588.79,292.93) 2607.93,312.07 ccw(c2637.07,341.21) 2637.07,300 2760,300 2820,240 2990,240 2990,850 2820,850 2820,460 2740,380 2620,380 2590,410
GND on Top Layer "NONET_L01_P-001" (solid, pour order 21): 785,905 785,1057.93 ccw(c695.5,1057.93) 758.79,1121.21 725,1155 525,1155 525,955 ccw(c575,955) 575,905
V_LOAD on Top Layer "NONET_L01_P-001" (solid, pour order 19): 1060,800 1060,640 ccw(c1225,640) 1225,475 1700,475 1700,585 1461.57,585 cw(c1461.57,854.35) 1271.11,663.89 1242.68,692.32 cw(c1333.64,783.28) 1205,783.28 1205,920 935,920 890,965 800,965 800,900 760,860 760,800
GND on Top Layer "NONET_L01_P-001" (solid, pour order 18): 1030,440 1255,440 1255,220 900,220 900,330 865,365 750,365 750,660 1030,660
5V_LDO on Top Layer "NONET_L01_P-001" (solid, pour order 17): 415,755 325,755 325,705 410,705 cw(c410,655) 460,655 460,220 730,220 730,680 1030,680 1030,780 730,780 730,860 623.28,860 ccw(c623.28,719.29) 523.79,818.79 491.82,786.82 cw(c415,863.64)
5V_PS on Top Layer "NONET_L01_P-001" (solid, pour order 16): 3215,200 3180,235 cw(c3119.64,295.35) 3119.64,210 2820,210 2750,280 2650,280 ccw(c2650,250) 2620,250 cw(c2590,250) 2590,220 2584.91,220 cw(c2584.91,400.86) 2457.03,272.97 2391.82,338.18 cw(c2541.07,487.43) 2330,487.43 2330,545 2325,540 2210,540 2210,425 2090,425 2090,130 3069.64,130 ccw(c3069.64,311.92) 3198.28,183.28
NetC1_1 on Top Layer "NONET_L01_P-001" (solid, pour order 13): 650,1760 650,1980 480,1980 480,1860 580,1860 580,1760
V_IN on Top Layer "NONET_L01_P-001" (solid, pour order 12): 830,1630 830,1740 520,1740 520,1630
V_IN_MOS on Top Layer "NONET_L01_P-001" (solid, pour order 10): 1055,1805 ccw(c1055,1860) 1110,1860 1110,1980 1331.72,1980 ccw(c1331.72,2096.57) 1414.14,2014.14 cw(c1500.7,1927.58) 1500.71,2050 1650,2050 1650,1830 cw(c1620,1830) 1620,1800 1577.57,1800 ccw(c1577.57,1588.59) 1428.08,1738.08 1383.93,1693.93 cw(c1229.59,1848.27) 1229.58,1630 960,1630 960,1760 660,1760 660,1980 1000,1980 1000,1860 ccw(c1055,1860)
MPPSET on Top Layer "NONET_L01_P-001" (solid, pour order 8): 890,1510 874.14,1510 ccw(c874.14,1451.72) 815.89,1450 640,1450 640,1610 820,1610 830,1600 830,1566.09 ccw(c862.38,1566.09) 848.04,1537.06 ccw(c878.28,1598.29) 878.28,1530 890,1530 850,1530 890,1530
GND on Top Layer "NONET_L01_P-001" (solid, pour order 7): 1920,1540 1960,1540 1960,1520 1721.17,1520 1721.17,1427.01 1540,1427.01 1540,1600 1721.17,1600 1721.17,1550 1900,1550 cw(c1900,1535) 1912,1544 ccw(c1920,1550)
NetC15_1 on Top Layer "NONET_L01_P-001" (solid, pour order 4): 1680,1410 1680,1300 1655,1275 1600,1275 1600,1220 1870,1220 1870,1320 1750,1320 1750,1410
NetC16_2 on Top Layer "NONET_L01_P-001" (solid, pour order 2): 1874.14,514.14 ccw(c1932.42,455.86) 1850,455.86 1850,360 1720,360 1720,130 2040,130 2040,490 ccw(c1990,490) 1990,540 1936.57,540 ccw(c1936.57,451.72)
GND on Top Layer "NONET_L01_P-001" (solid, pour order 1): 1840,850 1840,710 1900,650 1900,540 1800,540 1800,650 1700,650 1680,670 1590,670 1590,850
no net on Bottom Solder "NONET_L01_P-001" (solid): 1730,721.25 1730,448.75 1960,448.75 1960,721.25
no net on Bottom Solder "NONET_L01_P-001" (solid, pour order 6): 1340,2140 1340,1360 2070,1360 2070,2140
GND on Bottom Layer "NONET_L01_P-001" (solid, pour order 30): 0,0 3715,0 3715,2505 0,2505

## Keep-outs
Keep-Out Layer:
  lines w19.68: 0,0 3715,0 ; 0,0 0,2510 ; 0,0 0,2510 ; 0,2510 3715,2510 ; 0,2510 3715,2510 ; 3715,0 3715,2510 ; 3715,0 3715,2510

## Silkscreen, mask and mechanical layers (free items; w line width, h text height)
Top Overlay:
  lines w7.87: 1530,380 2260,380 2260,900 1530,900 1530,380
Bottom Solder:
  pour cut-out: 1755,2100 1755,1750 1685,1680 1570,1680 1570,1750 1550,1770 1535,1770 1515,1750 1515,1620 1800,1620 1870,1690 1805,1755 1805,2100

## Text inside footprints (layer, text, board x,y; h text height)
J_S1: Top Overlay "1" at 3564.53,880.75 h40 r90; Top Overlay "2" at 3445,855 h40 r90; Top Overlay "9" at 3559,1451 h40 r90; Top Overlay "10" at 3464,1446 h40 r90
J_S2: Top Overlay "10" at 272,1446 h40 r90; Top Overlay "9" at 367,1451 h40 r90; Top Overlay "2" at 253,855 h40 r90; Top Overlay "1" at 372.53,880.75 h40 r90
P2: Bottom Overlay "1" at 3603.32,1800 h50; Bottom Overlay "2" at 3623.32,1900 h50; Bottom Overlay "5" at 3263.32,1800 h50; Bottom Overlay "6" at 3263.32,1900 h50
P3: Bottom Overlay "1" at 510,1230 h50 r180; Bottom Overlay "2" at 490,1130 h50 r180; Bottom Overlay "4" at 750,1130 h50 r180; Bottom Overlay "3" at 750,1230 h50 r180